# Altium PCB PCB_PRO_OK_08-08-2011.PcbDoc (part 2 of 2)
Units mil, origin at the board's own origin, x right, y up, seen from the top; angles counter-clockwise.
Board outline 6942 x 4824 mil, 2 copper layers (Top Layer, Bottom Layer); 164 components, 92 nets, 659 pads, 68 vias.
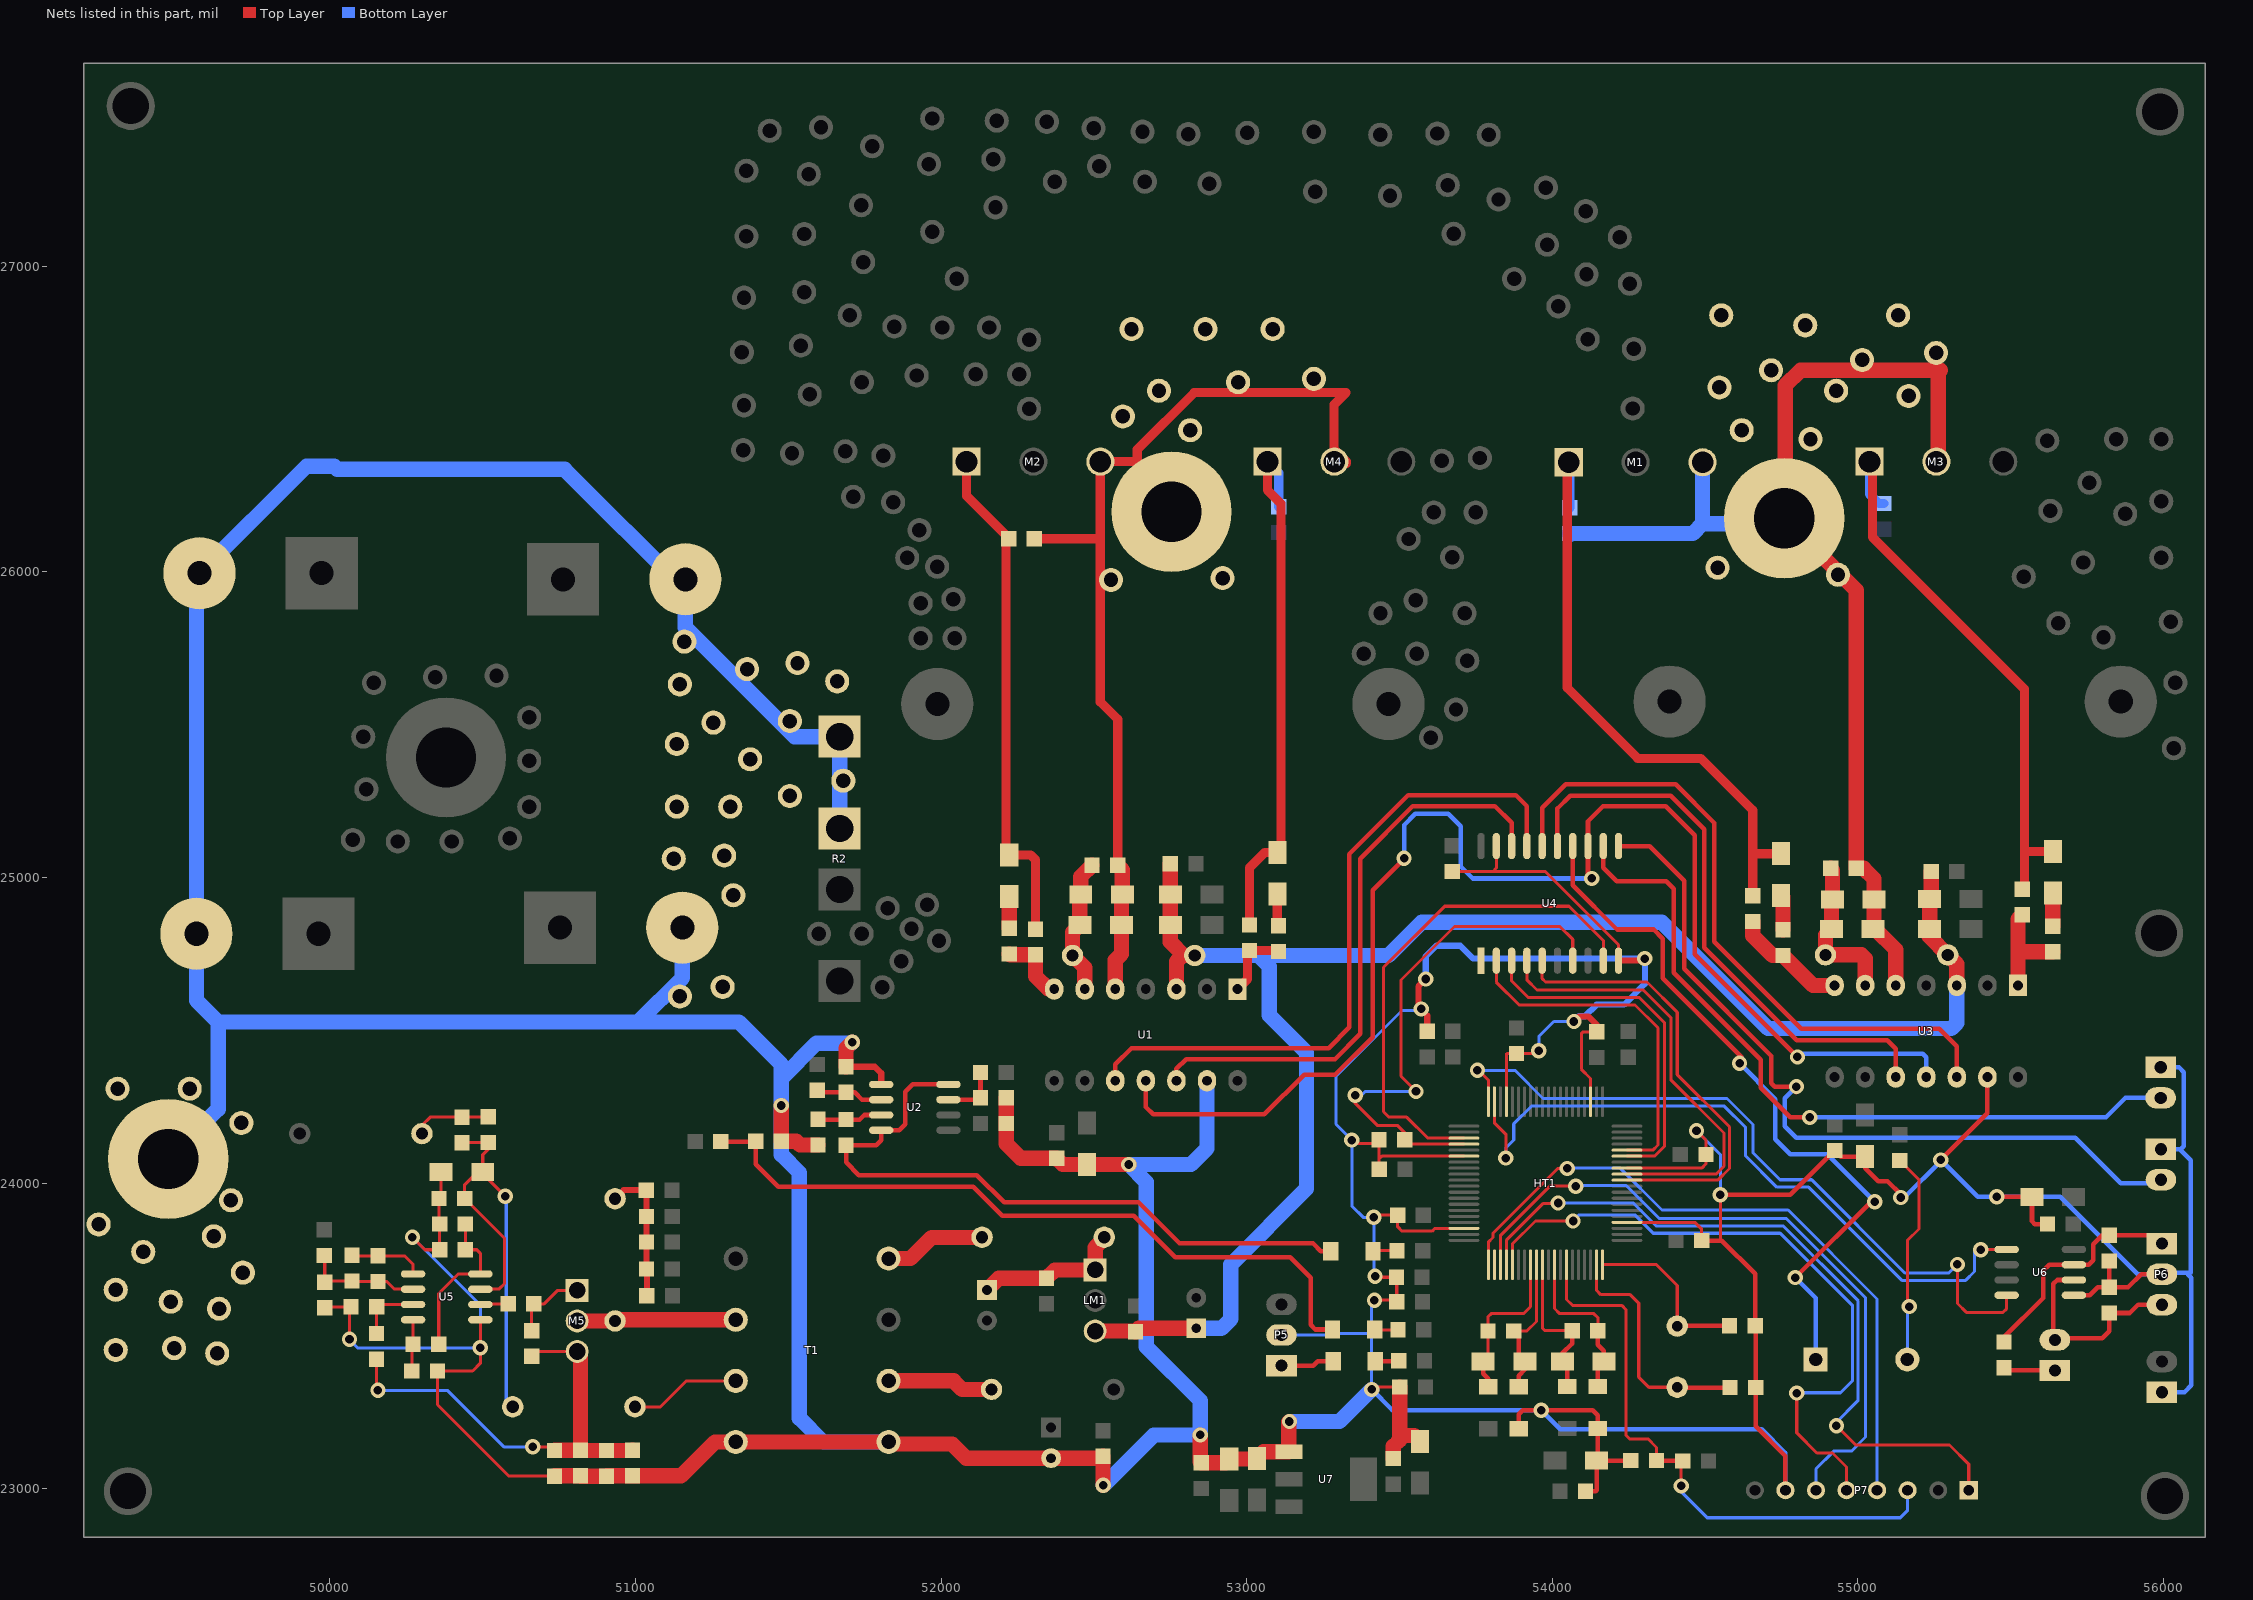
[diagram p2: the nets of this part, all layers, seen from the top]

## Via types
v1: diameter 50, hole 28, Top Layer to Bottom Layer, 68 vias

## Nets (pads, with @x,y where several pads share a name; then routed paths per layer and width w, separated by ;. In a path a pad name is that pad's centre, name@x,y a point inside that pad or via, vN(x,y) a via of type N, cw(c..) or ccw(c..) an arc to the next point about the centre after c; other vN are vias at no path point) (continued)
GND: C01.1 C1.2 C2.2 C3.1 C03.2 C7.2 C8.2 C14.1 C15.1 C16.1 C17.2 C18.2 C21.1 C23.2 C24.2 C25.2 C26.2 C27.1 C28.1 C29.1 C30.1 C32.1 C33.1 C34.1 C35.1 C36.1 C37.1 C38.2 C39.2 C40.2 C41.1 C42.1 C43.1 C44.2 C53.2 C54.1 C55.1 C56.1 C57.1 C58.2 C59.2 C60.2 C61.1 HT1.24 HT1.33 HT1.43 HT1.57 HT1.66 HT1.78 J4.1 L6.2 L7.2 P2.1 P3.1 P4.1 P5.2 P6.2 P7.7 pad.115 pad.116 pad.117 pad.118 pad.119 pad.120 pad.121 pad.122 pad.123 pad.124 pad.125 pad.126 pad.127 pad.128 pad.163 pad.164 pad.165 pad.166 pad.167 pad.168 pad.169 pad.170 pad.171 pad.172 pad.173 pad.174 pad.175 pad.176 pad.177 pad.178 pad.182 pad.183 R2.1 R2.2 R8.2 R14.2 R27.1 R36.2 R37.2 R38.2 R39.2 R40.1 R41.1 T1.4 T1.5 U1.13 U2.4 U3.13 U4.10 U4.19 U5.5 U6.5 U7.1 | length 31789.2
  Top Layer w10: R40.1@49983,23592 49986,23595 C30.1@50069,23595 50064,23590 v1(50064,23489) ; v1(50270,23823) 50311,23782 C24.2@50359,23782 C25.2@50359,23866 50357,23868 C03.2@50357,23950 50364,23957 C23.2@50364,24036 ; U5.5@50492.14,23552.81 v1(50492.14,23461) 50492.14,23410.14 50467,23385 C26.2@50352,23385 50352,23275 50586,23041 R39.2@50735,23041 R39.2@50737,23039 ; R38.2@50817,23039 R38.2@50820,23042 ; R37.2@50904,23042 R37.2@50905,23041 R37.2@50906,23042 ; v1(53344,24141) 53344,24129 53433,24129 53433,24079 ; v1(53409,23325) 53413,23321 53425,23333 C37.1@53501,23333 ; v1(53416,23888) 53423,23895 C36.1@53494,23895 53494,23857 53508,23843 53607,23843 53616.09,23852.09 HT1.78@53711.06,23852.09 ; v1(53418,23617) 53486,23617 C27.1@53491,23612 53491,23691 C32.1@53490,23692 53423,23692 v1(53420,23695) ; C43.1@53434,24045 53433,24046 53433,24079 ; v1@53569,24572 v1(53571,24570) ; C21.1@53673,25020 53806,25020 ; HT1.66@53711.06,24088.31 53442.31,24088.31 53433,24079 ; U4.19@53817,25103 53817,25031 53806,25020 ; HT1.57@53849.84,24266.46 53849.84,24421.84 53852,24424 C35.1@53883,24424 53947,24424 v1(53956,24433) ; HT1.43@54125.43,24266.46 54125.43,24342.57 54095,24373 54095,24489 54101,24495 C34.1@54146,24495 ; U4.10@54217,24728 54217,24780 53977,25020 53806,25020 ; HT1.24@54244.52,23871.78 54466.22,23871.78 54489,23849 C33.1@54489,23812 ; HT1.33@54244.52,24048.94 54488.94,24048.94 54503,24063 C42.1@54503,24094 54503,24140 v1(54472,24171) ; v1(54550,23962) 54550,23817 54555,23812
  Top Layer w15: C59.2@52943,23097 C59.2@52945,23099 ; L7.2@53890,23196 53890,23244 53903,23257 v1(53964,23257) 54133,23257 54149,23241 L6.2@54149,23197 54149,23096 C53.2@54145,23092 ; C54.1@54109,22992 54142,22992 54145,22995 C53.2@54145,23092 ; C56.1@54257,23092 C53.2@54145,23092 ; C33.1@54489,23812 54555,23812 54664,23703 C29.1@54664,23533 54666,23531 C28.1@54666,23331 54666,23204 54763,23107 P7.7@54763,22995 ; v1(54550,23962) 54779,23962 C16.1@54924,24107 54944,24087 C18.2@55024,24087 ; C18.2@55024,24073 C18.2@55024,24087 ; v1(55140,23953) 55140,23963 55097,24006 55067,24006 55024,24049 C18.2@55024,24087 ; v1(55271,24076) 55424,24229 U3.13@55424,24347 ; v1(55455,23955) C40.2@55570,23955 55570,23875 55579,23866 C41.1@55621,23866 ; U6.5@55707,23633 55759,23633 55785,23659 C44.2@55823,23659 ; C55.1@55823,23745 C44.2@55823,23659 ; P6.2@55995,23702 55927,23702 55884,23659 C44.2@55823,23659
  Top Layer w20: C14.1@51689,24381 51783,24381 51804,24360 U2.4@51804,24323 ; v1@53562,24577 53562,24644 v1(53586,24668) ; C01.1@53591,24497 53591,24548 ; v1@54087,24545 54119,24545 54146,24518 C34.1@54146,24495 ; U4.10@54217,24728 v1@54296,24728
  Top Layer w50: R39.2@50735,23041 50736,23042 R38.2@50820,23042 50821,23041 R37.2@50905,23041 ; R37.2@50906,23042 R36.2@50990,23042 51149,23042 51260,23153 T1.4@51328,23153 T1.5@51828,23153 51835,23146 52036,23146 52082,23100 C39.2@52360,23100 52524,23100 C38.2@52530,23106 52530,23011 v1(52531,23011) ; v1(51477,24254) R41.1@51477,24137 51526,24137 51538,24125 R8.2@51597,24125 ; C14.1@51689,24381 51689,24441 v1(51709,24461) ; R14.2@52213,24279 C3.1@52213,24195 52213,24129 52261,24081 C15.1@52378,24081 52398,24061 C17.2@52478,24061 v1(52614,24061) ; v1(52848,23176) 52848,23088 C57.1@52851,23085 52931,23085 C59.2@52943,23097 53031,23097 C58.2@53033,23099 53055,23121 U7.1@53138,23121 53138,23218 v1(53140,23220) ; C61.1@53480,23099 53480,23139 ; 53496,23155 53501,23160 53501,23174 ; C37.1@53501,23333 53501,23174 ; C60.2@53548,23174 53501,23174
  Bottom Layer w10: v1(50064,23489) 50062,23489 50090,23461 v1(50492.14,23461) 50492.14,23600.86 v1(50270,23823) ; P5.2@53114,23503 53283,23503 53288,23508 53409,23508 ; v1(53409,23325) 53409,23508 ; v1(53418,23617) 53409,23608 53409,23508 ; v1(53420,23695) 53416,23699 v1(53416,23888) 53381,23888 53344,23925 v1(53344,24141) 53292,24193 53292,24349 53508,24565 53571,24565 v1(53571,24570) ; v1(53956,24433) 53956,24480 54005,24529 v1(54071,24529) ; v1(54472,24171) 54551,24092 54551,23963 v1(54550,23962)
  Bottom Layer w15: v1(53409,23325) 53477,23257 v1(53964,23257) 54026,23195 54685,23195 54763,23117 P7.7@54763,22995 ; v1(55140,23953) 55152,23953 55271,24072 v1(55271,24076) 55392,23955 v1(55455,23955) 55663,23955 55916,23702 P6.2@55995,23702 56000,23707 56089,23707 56089,24075 56053,24111 ; P2.1@55991,24379 56051,24379 56067,24363 56067,24121 56057,24111 56053,24111 ; P3.1@55992,24111 56053,24111 ; P4.1@55995,23316 56069,23316 56091,23338 56091,23690 56079,23702 56084,23702
  Bottom Layer w20: v1(53586,24668) 53586,24742 53621,24777 53699,24777 53741,24735 v1(54303,24735) 54303,24652 54235,24584 54145,24584 54107,24546 v1@54088,24546
  Bottom Layer w50: J4.1@49471,24079 49634,24242 49634,24527 ; C8.2@51153,24836 51153,24672 51008,24527 ; C2.2@51163,25976 C2.2@51163,25941 ; R2.2@51668,25161 R2.1@51668,25461 51520,25461 51163,25818 C2.2@51163,25941 ; v1(51709,24461) 51706,24458 51592,24458 51477,24343 ; T1.5@51828,23153 51614,23153 51536,23231 51536,24034 51477,24093 v1(51477,24254) 51477,24343 ; v1(52531,23011) 52696,23176 v1(52848,23176) 52848,23288 52671,23465 52671,24004 v1(52614,24061) 52818,24061 52870,24113 U1.13@52870,24335 ; v1(53140,23220) 53304,23220 v1(53409,23325) ; C7.2@49569.5,25992.5 49563,25986 C1.2@49563,24816 49563,24598 49634,24527 ; C7.2@49569.5,25992.5 C7.2@49573,25996 ; C7.2@49569.5,25992.5 49566,25996 C7.2@49573,25996 ; C7.2@49573,25996 49923,26346 50014,26346 50024,26336 50768,26336 C2.2@51163,25941 ; 49634,24527 51008,24527 ; 51008,24527 51338,24527 51477,24388 51477,24343
I_IN_SEN: L2.1 R7.2 U2.1 U2.5 | length 2261.6
  Top Layer w15: U2.5@52024,24323 51907,24323 51883,24299 51883,24193 51863,24173 U2.1@51804,24173 51804,24140 51788,24124 R7.2@51689,24124 51689,24068 51731,24026 52117,24026 52206,23937 52646,23937 52780,23803 53217,23803 53243,23777 L2.1@53275.21,23777
LED_ATTERY_LOW: P2.2 U4.12 | length 2475.6
  Top Layer w15: U4.12@54167,25103 54167,25032 54211,24988 54373,24988 54398,24963 54398,24688 54682,24404 54682,24312.5 54741.5,24253 54741,24253 54779,24215 v1(54843,24215)
  Bottom Layer w15: v1(54843,24215) 55812,24215 55876,24279 P2.2@55991,24279
LED_VERLOAD: P3.2 U4.11 | length 2600.5
  Top Layer w15: U4.11@54217,25103 54319,25103 54432,24990 54432,24701 54717,24416 54717,24327 54728,24316 54781,24316 v1@54790,24307 ; v1@54799,24298 v1(54799,24316)
  Bottom Layer w15: v1(54799,24316) 54761,24278 54761,24186 54798,24149 55711,24149 55860,24000 55981,24000 P3.2@55992,24011
M+: C13.1 C_BOOT2.2 C_BOOT02.2 J3.1 M2.3 M4.2 pad.105 pad.106 pad.107 pad.108 pad.109 pad.110 pad.111 pad.112 pad.113 pad.114 R6.2 U1.5 | length 3167.4
  Top Layer w30: R6.2@52305,26109 52519,26109 52521,26111 ; C13.1@52578,25040 52578,25518 52521,25575 52521,26111 ; M4.2@53327,26356 53327,26361 53286,26402 53286,26548 53325,26587 52828,26587 52642,26401 52642,26361 M2.3@52521,26361 52521,26111
  Top Layer w50: U1.5@52570,24635 52570,24730 52590,24750 C_BOOT2.2@52590,24845 52590,24942 C_BOOT02.2@52593,24945 52593,25025 C13.1@52578,25040
M-: C12.1 C_BOOT1.2 C_BOOT01.2 J2.1 M1.3 M3.2 pad.92 pad.93 pad.94 pad.95 pad.96 pad.97 pad.98 pad.99 pad.100 pad.101 pad.102 pad.103 pad.104 R5.2 U3.5 | length 3883.4
  Top Layer w50: J2.1@54759,26176 54995,25940 C12.1@54995,25030 55019,25030 55053,24996 C_BOOT01.2@55053,24928 55053,24835 C_BOOT1.2@55050,24832 55056,24832 55124,24764 U3.5@55124,24647 ; J2.1@54790,26207 54762,26235 54762,26610 54812,26660 55270,26660 55263,26653 M3.2@55263,26351
  Bottom Layer w50: R5.2@54060,26123 R5.2@54057,26126 54460,26126 54492,26158 ; M1.3@54492,26359 54492,26158 ; J2.1@54759,26176 54741,26158 54492,26158
NET_G1: DG2.1 M1.1 R3.1 R5.1 | length 2027.2
  Top Layer w30: M1.1@54049,26351 54049,25621 54280,25390 54486,25390 54656,25220 54656,25076 ; R3.1@54656,24940 54656,25076 ; DG2.1@54749,25078 54658,25078 54656,25076
  Bottom Layer w30: M1.1@54054,26359 54057,26356 R5.1@54057,26210
NET_G2: R3.2 R04.2 U3.7 | length 381.5
  Top Layer w50: R3.2@54656,24856 54656,24810 54721,24745 R04.2@54755,24745 54853,24647 U3.7@54924,24647
NET_G3: R09.2 R9.2 U3.1 | length 351.6
  Top Layer w50: U3.1@55524,24647 55524,24755 ; R9.2@55538,24878 55524,24864 55524,24755 ; R09.2@55638,24757 55526,24757 55524,24755
NET_G5: DG4.1 M3.1 R9.1 R11.1 | length 1857
  Top Layer w30: M3.1@55048,26351 55048,26114 55545,25617 55545,25084 ; R9.1@55538,24962 55545,24969 55545,25084 ; DG4.1@55638,25085 55546,25085 55545,25084
  Bottom Layer w30: M3.1@55038,26361 55038,26255 55069,26224 R11.1@55085,26224
NET_G6: DG3.1 M4.1 R10.2 R12.1 | length 1771.3
  Top Layer w30: R10.2@53009,24845 53009,25032 53059,25082 DG3.1@53101,25082 53112,25082 53112,26224 53068,26268 M4.1@53068,26361
  Bottom Layer w30: M4.1@53068,26361 53105,26324 R12.1@53105,26213
NET_G8: DG1.1 M2.1 R4.2 R6.1 | length 1660.2
  Top Layer w30: M2.1@52083,26361 52083,26249 52212.33,26119.67 DG1.1@52212.33,25074 ; DG1.1@52223,25074 52293,25074 52309,25058 R4.2@52309,24831
NET_G9: R05.1 R10.1 U1.1 | length 238.4
  Top Layer w30: U1.1@52970,24635 53003,24668 53003,24755 R10.1@53009,24761 53101,24761 R05.1@53104,24758
NET_G10: R4.1 R06.1 U1.7 | length 235.6
  Top Layer w50: R06.1@52223,24750 52226,24747 R4.1@52309,24747 52309,24677 52351,24635 U1.7@52370,24635
NetC02_2: C02.2 C22.2 D2.1 R20.2 R21.2 R22.2 | length 460.4
  Top Layer w20: D2.1@50933,23949 50961,23977 C02.2@51035,23977 51036,23976 C22.2@51036,23891 R22.2@51036,23807 R20.2@51036,23719 51037,23718 R21.2@51037,23631
NetC12_2: C12.2 C_BOOT01.1 C_BOOT1.1 D_BOOT1.2 U3.6 | length 518
  Top Layer w50: C12.2@54911,25030 54917,25024 C_BOOT01.1@54917,24928 54914,24925 C_BOOT1.1@54914,24832 54894,24812 D_BOOT1.2@54894,24747 55012,24747 55024,24735 U3.6@55024,24647
NetC13_2: C13.2 C_BOOT2.1 C_BOOT02.1 D_BOOT2.2 U1.6 | length 448.1
  Top Layer w50: U1.6@52470,24635 52470,24705 D_BOOT2.2@52430,24745 52430,24821 C_BOOT2.1@52454,24845 52454,24942 C_BOOT02.1@52457,24945 52457,25003 C13.2@52494,25040
NetC14_2: C14.2 R1.1 U2.3 | length 221.8
  Top Layer w15: R1.1@51595,24304 51602,24297 C14.2@51689,24297 51717,24297 51741,24273 U2.3@51804,24273
NetC24_1: C24.1 C25.1 R28.2 U5.8 | length 534
  Top Layer w10: R28.2@50356,23473 50356,23639 50419.81,23702.81 U5.8@50492.14,23702.81 50492.14,23770.14 50480.28,23782 C24.1@50443,23782 C25.1@50443,23866
NetC26_1: C26.1 R28.1 U5.4 | length 169.5
  Top Layer w10: C26.1@50268,23385 50268,23469 R28.1@50272,23473 50272,23552.67 U5.4@50272.14,23552.81
NetC28_2: C28.2 HT1.19 X1.1 | length 794.4
  Top Layer w10: HT1.19@54145.11,23733 54145.11,23648.89 54159,23635 54255,23635 54283,23607 54283,23365 54316,23332 X1.1@54409,23332
  Top Layer w15: X1.1@54409,23332 54410,23331 C28.2@54582,23331
NetC29_2: C29.2 HT1.20 X1.2 | length 576.8
  Top Layer w10: HT1.20@54164.8,23733 54341,23733 54409,23665 X1.2@54409,23532
  Top Layer w15: X1.2@54409,23532 54410,23533 C29.2@54580,23533
NetC30_2: C30.2 R33.1 U5.3 | length 209.8
  Top Layer w10: R33.1@50152,23508 50153,23509 C30.2@50153,23595 50160.81,23602.81 U5.3@50272.14,23602.81
NetC31_1: C31.1 R31.2 U5.1 | length 243.7
  Top Layer w10: R31.2@50072,23764 50074,23762 C31.1@50157,23762 50244,23762 50272.14,23733.86 U5.1@50272.14,23702.81
NetC31_2: C31.2 R31.1 R34.1 R40.2 U5.2 | length 389.9
  Top Layer w10: R34.1@49981,23763 49983,23761 R40.2@49983,23676 49987,23680 R31.1@50072,23680 50074,23678 C31.2@50157,23678 50186,23678 50211.19,23652.81 U5.2@50272.14,23652.81
NetC44_1: C44.1 P6.3 PC1.2 U6.6 | length 693.8
  Top Layer w15: PC1.2@55645,23487 PC1.2@55640,23492 ; U6.6@55707,23683 55652,23683 55640,23671 PC1.2@55640,23492 ; P6.3@55995,23602 55917,23602 55890,23575 C44.1@55823,23575 55823,23515 55800,23492 PC1.2@55640,23492
NetC47_1: C47.1 C48.1 D3.1 LM1.1 | length 507.2
  Top Layer w50: C47.1@52150,23650 52189,23689 C48.1@52345,23689 52372,23716 LM1.1@52504,23716 52504,23789 52540,23825 D3.1@52540,23827
NetC49_1: C49.1 C50.2 HT1.8 L4.1 | length 532
  Top Layer w10: C49.1@53774,23416 53790,23432 C50.2@53790,23516 53790,23563 53800,23573 53906,23573 53928.58,23595.58 HT1.8@53928.58,23733
  Top Layer w15: C49.1@53774,23416 53774,23376 53790,23360 L4.1@53790,23333.79
NetC49_2: C49.2 C50.1 HT1.9 L7.1 | length 478.3
  Top Layer w10: C50.1@53874,23516 53917,23516 53948.26,23547.26 HT1.9@53948.26,23733
  Top Layer w15: C50.1@53874,23516 53890,23500 53890,23436 C49.2@53910,23416 53910,23390 53890,23370 L7.1@53890,23333.79
NetC51_1: C51.1 C52.2 HT1.10 L5.1 | length 510.4
  Top Layer w10: HT1.10@53967.95,23733 53967.95,23525.05 53976,23517 C52.2@54065,23517
  Top Layer w15: L5.1@54049,23334.79 54049,23401 C51.1@54033,23417 54033,23443 54065,23475 C52.2@54065,23517
NetC51_2: C51.2 C52.1 HT1.12 L6.1 | length 539.1
  Top Layer w10: HT1.12@54007.32,23733 54007.32,23589.68 54024,23573 54136,23573 54149,23560 C52.1@54149,23517
  Top Layer w15: L6.1@54149,23334.79 54149,23397 C51.2@54169,23417 54169,23451 54149,23471 C52.1@54149,23517
NetC55_2: C55.2 P6.1 R43.1 U6.7 | length 764.7
  Top Layer w15: R43.1@55478,23480 55478,23495 55607,23624 55607,23714 55626,23733 U6.7@55707,23733 55756,23733 55771,23748 55771,23800 55800,23829 C55.2@55823,23829 55968,23829 P6.1@55995,23802
NetD1_2: D1.2 R16.1 R17.1 | length 255.6
  Top Layer w10: D1.2@50301,24162 50301,24189 50328,24216 R16.1@50432,24216 50433,24217 R17.1@50518,24217
NetD2_2: D2.2 M5.2 T1.2 | length 520.7
  Top Layer w10: D2.2@50933,23549 D2.2@50937,23553
  Top Layer w50: M5.2@50809,23549 D2.2@50933,23549 ; D2.2@50937,23553 T1.2@51328,23553
NetD3_2: D3.2 T1.8 | length 340.6
  Top Layer w50: T1.8@51828,23753 51900,23753 51969,23822 D3.2@52140,23822
NetD4_2: D4.2 T1.6 | length 348.6
  Top Layer w50: T1.6@51828,23353 52041,23353 52069,23325 D4.2@52165,23325
NetD5_2: D5.2 T1.3 | length 365.2
  Top Layer w10: D5.2@50998,23268 51082,23268 51167,23353 T1.3@51328,23353
NetDG1_2: DG1.2 R06.2 | length 104
  Top Layer w50: R06.2@52223,24834 DG1.2@52223,24938
NetDG2_2: DG2.2 R04.1 | length 115.5
  Top Layer w50: DG2.2@54749,24942 54755,24936 R04.1@54755,24829
NetDG3_2: DG3.2 R05.2 | length 105.7
  Top Layer w30: DG3.2@53100,24946 53100,24846 R05.2@53104,24842
NetDG4_2: DG4.2 R09.1 | length 108
  Top Layer w50: R09.1@55638,24841 DG4.2@55638,24949
NetL1_2: L1.2 R30.2 | length 76.6
  Top Layer w10: L1.2@53418.79,23521 53419.79,23520 R30.2@53495,23520
NetL2_2: L2.2 R35.2 | length 79.8
  Top Layer w10: L2.2@53413,23777 53415,23779 R35.2@53492,23779
NetL3_1: L3.1 P5.1 | length 175
  Top Layer w15: P5.1@53114,23403 53218,23403 53232,23417 L3.1@53283.21,23417
NetL3_2: L3.2 R42.2 | length 77.8
  Top Layer w15: L3.2@53421,23417 53496,23417 R42.2@53498,23419
NetLS1_1: LS1.1 U4.14 | length 2428.2
  Top Layer w15: U4.14@54067,25103 54067,24975 54212,24830 54332,24830 54362,24800 54362,24670 54620,24412 54613,24405 v1(54613,24392) ; v1(54795,23691) 55055,23951 v1(55055,23939) ; LS1.1@54839,23446 LS1.1@54862,23423
  Bottom Layer w15: v1(54613,24392) 54730,24275 54730,24143 54779,24094 54900,24094 v1(55055,23939) ; v1(54795,23691) 54862,23624 LS1.1@54862,23423
NetLS1_2: LS1.2 R15.1 | length 697.8
  Top Layer w10: R15.1@55137,24074 55200,24011 55200,23850 55162,23812 55162,23602 v1(55168,23596)
  Bottom Layer w10: LS1.2@55162,23423 55162,23590 v1(55168,23596)
NetM5_1: M5.1 R26.1 R29.1 | length 251.1
  Top Layer w10: R29.1@50660,23517 50660,23598 R26.1@50667,23605 50701,23605 50745,23649 M5.1@50809,23649
NetM5_3: M5.3 R29.2 R33.2 R36.1 R37.1 R38.1 R39.1 | length 1537
  Top Layer w10: R33.2@50152,23424 50152,23327 v1(50157,23322) ; R29.2@50660,23433 50676,23449 M5.3@50809,23449 M5.3@50803,23443 ; v1(50664,23137) 50723,23137 R39.1@50735,23125 R39.1@50736,23126 ; R38.1@50803,23143 R38.1@50820,23126 R38.1@50821,23125 ; R37.1@50905,23125 R37.1@50906,23126
  Top Layer w50: R39.1@50736,23126 R38.1@50820,23126 50820,23438 M5.3@50809,23449 ; R38.1@50821,23125 R37.1@50905,23125 50989,23125 R36.1@50990,23126
  Bottom Layer w10: v1(50157,23322) 50384,23322 50569,23137 v1(50664,23137)
NetPC1_1: PC1.1 R43.2 | length 170.7
  Top Layer w15: R43.2@55478,23396 55487,23387 PC1.1@55645,23387
NetR7_1: R7.1 R8.1 U2.2 | length 213.6
  Top Layer w15: R8.1@51597,24209 51598,24208 R7.1@51689,24208 51733,24208 51748,24223 U2.2@51804,24223
NetR13_2: R13.2 R14.1 U2.6 | length 190.5
  Top Layer w15: U2.6@52024,24273 52123,24273 R14.1@52129,24279 R13.2@52129,24362
NetR26_2: R26.2 U5.6 | length 91.8
  Top Layer w10: U5.6@50492.14,23602.81 50494.33,23605 R26.2@50583,23605
NRESET: C56.2 HT1.14 P7.3 R44.1 | length 1933.2
  Top Layer w10: HT1.14@54046.69,23733 54046.69,23619.31 54066,23600 54227,23600 54242,23585 54242,23174 54253,23163 54313,23163 54341,23135 C56.2@54341,23092 ; v1(54422,23009) 54422,23088 R44.1@54426,23092
  Top Layer w15: C56.2@54341,23092 R44.1@54426,23092
  Bottom Layer w10: v1(54422,23009) 54422,22990 54507,22905 55139,22905 55163,22929 P7.3@55163,22995
NTRST: HT1.4 P7.1 | length 2427.3
  Top Layer w10: HT1.4@53849.84,23733 53849.84,23812.84 53971,23934 v1@54019,23934 ; v1(54930,23206) 54993,23143 55300,23143 55363,23080 P7.1@55363,22995
  Bottom Layer w10: v1(54019,23935) 54265.06,23935 54340.06,23860 54755.94,23860 55001,23614.94 55001,23289 54924,23212 v1(54930,23206)
OFF_PWM: HT1.64 R27.2 U4.7 | length 1770.5
  Top Layer w10: v1(53355,24288) 53355,24261 53427,24189 53493,24189 53517,24165 R27.2@53517,24142 53517,24129 53518.32,24127.68 HT1.64@53711.06,24127.68 ; v1(53554,24300) 53554,24301 53505,24350 53505,24665 53680,24840 54025,24840 54067,24798 U4.7@54067,24728
  Bottom Layer w10: v1(53355,24288) 53376,24288 53388,24300 v1(53554,24300)
OFF_PWM_O: U1.11 U3.11 U4.13 | length 4435
  Top Layer w15: U1.11@52670,24335 52670,24249 52694,24225 53058,24225 53188,24355 53289,24355 53412,24478 53412,24958 53515,25061 v1(53515,25063) ; v1(54129,24997) 54117,25009 U4.13@54117,25103 54117,25184 54166,25233 54371,25233 54466,25138 54466,24749.35 v1(54802.35,24413)
  Bottom Layer w15: v1(53515,25063) 53515,25172 53552,25209 53660,25209 53701,25168 53701,25036 53740,24997 v1(54129,24997) ; v1(54802.35,24413) 54813.35,24424 55212,24424 55224,24412 U3.11@55224,24347
OVERLOAD: HT1.63 U4.9 | length 1685.4
  Top Layer w10: HT1.63@53711.06,24147.37 53592.23,24147.37 53523.6,24216 53465.82,24216 53448,24233.82 53448,24706.18 53647.82,24906 54055,24906 54167,24794 U4.9@54167,24728
PWM1H: HT1.31 U4.5 | length 1479.7
  Top Layer w10: U4.5@53967,24728 53967,24669 53978,24658 54310,24658 54409,24559 54409,24355 54580,24184 54580,24048.16 54541.41,24009.57 HT1.31@54244.52,24009.57
PWM1H_O: U3.10 U4.15 | length 1911
  Top Layer w15: U4.15@54017,25103 54017,25226 54059,25268 54388.33,25268 54498,25158.33 54498,24769.67 54799.67,24468 55096,24468 55124,24440 U3.10@55124,24347
PWM1L: HT1.32 U4.4 | length 1471.7
  Top Layer w10: U4.4@53917,24728 53917,24665.26 53950.26,24632 54298,24632 54388,24542 54388,24338 54562,24164 54562,24055.62 54535.64,24029.26 HT1.32@54244.52,24029.26
PWM1L_O: U3.12 U4.16 | length 2197.7
  Top Layer w15: U4.16@53967,25103 53967,25228.33 54043.67,25305 54403.65,25305 54530,25178.65 54530,24790 54815,24505 55267,24505 55324,24448 U3.12@55324,24347
PWM2H: HT1.35 U4.3 | length 1163.3
  Top Layer w10: U4.3@53867,24728 53867,24661.52 53920.52,24608 54284,24608 54367,24525 54367,24120.54 54334.77,24088.31 HT1.35@54244.52,24088.31
PWM2H_O: U1.10 U4.17 | length 2243.9
  Top Layer w15: U1.10@52570,24335 52570,24389 52623,24442 53268,24442 53336,24510 53336,25076.91 53529.09,25270 53881,25270 53917,25234 U4.17@53917,25103
PWM2L: HT1.36 U4.2 | length 1152.8
  Top Layer w10: U4.2@53817,24728 53817,24657.78 53891.78,24583 54271,24583 54346,24508 54346,24125 54329,24108 HT1.36@54244.52,24108
PWM2L_O: U1.12 U4.18 | length 1926.7
  Top Layer w15: U1.12@52770,24335 52770,24374 52802,24406 53289,24406 53372,24489 53372,25062 53544,25234 53812,25234 53867,25179 U4.18@53867,25103
RXD1: HT1.59 U6.1 | length 2339.5
  Top Layer w10: HT1.59@53810.47,24266.46 53810.47,24197.53 53848,24160 v1(53848,24082) ; v1(55402,23782) 55400,23782 55399,23783 U6.1@55487,23783
  Bottom Layer w10: v1(53848,24082) 53848,24115 53874,24141 53874,24194 53932,24252 54562.94,24252 54633,24181.94 54633,24089.06 54735.06,23987 54838.94,23987 55143.94,23682 55352.94,23682 55382,23711.06 v1@55382,23780 ; v1@55382,23781 v1@55382,23780 ; v1(55402,23782) 55401,23781 55383,23781 v1@55382,23780
TCK: HT1.5 P7.5 | length 2204.6
  Top Layer w10: HT1.5@53869.52,23733 53869.52,23800.52 53945,23876 v1(54068,23876) ; v1(54800,23313) 54800,23183 54866,23117 54917,23117 54963,23071 P7.5@54963,22995
  Bottom Layer w10: v1(54068,23876) 54088.03,23896.03 54270.09,23896.03 54330.12,23836 54746,23836 54983,23599 54983,23354 54943,23314 54800,23314 v1(54800,23313)
TDI: HT1.2
TDO: HT1.1 P7.4 | length 2257.8
  Top Layer w10: HT1.1@53790.78,23733 53790.78,23806.78 53806,23822 53806,23836 54018,24048 v1(54049,24048)
  Bottom Layer w10: v1(54049,24048) 54050,24049 54222,24049 54359,23912 54772,23912 55063,23621 P7.4@55063,22995
TMS: HT1.3 P7.6 | length 2240.9
  Top Layer w10: HT1.3@53830.15,23733 53830.15,23828.15 53992,23990 v1(54077,23990)
  Bottom Layer w10: v1(54077,23990) 54079,23992 54242,23992 54350,23884 54765.88,23884 55025,23624.88 55025,23169 54979,23123 54921,23123 54863,23065 P7.6@54863,22995
TXD1: HT1.60 U6.4 | length 2396.3
  Top Layer w10: v1(53755,24369) 53774,24369 53766.5,24361.5 53790.78,24337.22 HT1.60@53790.78,24266.46 ; v1(55326,23734) 55326,23606 55355,23577 55475,23577 55487,23589 U6.4@55487,23633
  Bottom Layer w10: v1(53755,24369) 53878,24369 53970,24277 54571.88,24277 54657,24191.88 54657,24099 54745,24011 54848.88,24011 55153.88,23706 55298,23706 v1(55326,23734)
V_DRIVE: C4.2 C5.1 C6.1 C9.2 C10.1 C11.1 C45.1 C46.1 D_BOOT1.1 D_BOOT2.1 LM1.3 U1.3 U3.3 | length 5518.4
  Top Layer w50: LM1.3@52504,23516 52634,23516 C45.1@52636,23514 52647,23525 C46.1@52835,23525 ; C9.2@52750,25045 C10.1@52750,24945 C11.1@52750,24845 52750,24789 52794,24745 D_BOOT2.1@52830,24745 ; U1.3@52770,24635 52770,24725 52790,24745 ; C4.2@55240,25020 55240,24935 C5.1@55235,24930 55235,24833 C6.1@55234,24832 55234,24807 D_BOOT1.1@55294,24747 55324,24717 U3.3@55324,24647
  Bottom Layer w50: D_BOOT2.1@52830,24745 53038,24745 ; C46.1@52835,23525 52917,23525 52948,23556 52948,23734 53196,23982 53196,24427 53074,24549 53074,24709 53038,24745 ; U3.3@55324,24647 55324,24524 55306,24506 54706,24506 54358,24854 53573,24854 53464,24745 53038,24745
V_IN_SEN: L1.1 R32.1 R41.2 | length 2391.7
  Top Layer w15: R32.1@51279,24136 51392,24136 R41.2@51393,24137 51393,24062 51467,23988 52105,23988 52200,23893 52630,23893 52766,23757 53143,23757 53210,23690 53210,23536 53225,23521 L1.1@53281,23521
VCC: U4.1
VDD_KA: C03.1 C23.1 D5.1 R16.2 R17.2 U5.7 | length 1539.7
  Top Layer w10: R16.2@50432,24132 50433,24133 R17.2@50518,24133 50518,24111 50500,24093 C23.1@50500,24036 ; U5.7@50492.14,23652.81 50552.81,23652.81 50571,23671 50571,23820 C03.1@50441,23950 50441,23995 50482,24036 C23.1@50500,24036 ; v1(50574,23957) 50500,24031 C23.1@50500,24036
  Bottom Layer w10: v1(50574,23957) 50577,23954 50577,23289 D5.1@50598,23268
pads on no net: HOLE1.1 HOLE2.1 HOLE3.1 HOLE4.1 HOLE5.1 HT1.11 HT1.13 HT1.15 HT1.16 HT1.22 HT1.23 HT1.25 HT1.26 HT1.27 HT1.28 HT1.29 HT1.30 HT1.37 HT1.38 HT1.39 HT1.40 HT1.44 HT1.46 HT1.47 HT1.48 HT1.49 HT1.50 HT1.51 HT1.52 HT1.53 HT1.55 HT1.65 HT1.68 HT1.69 HT1.70 HT1.71 HT1.72 HT1.73 HT1.74 HT1.75 HT1.76 P7.2 U1.4 U1.8 U1.14 U3.4 U3.8 U3.14

## Polygon pours and split planes (outlines as drawn)
GND on Bottom Layer "BOT_GND_BAT" (solid, pour order 1015): 49203,27214 49757,27214 49757,27660 50999,27661 51167,27659 51167,26121 51308,26121 51308,25831 51767,25830 51755,25100 51531,25109 51450,25028 51450,24523 51301,24374 50158,24374 50158,23913 49691,23446 49201,23445
48VDC on Bottom Layer "48V_VDC" (solid, pour order 1001): 49977,25729 49981,25725 50768,25725 50768,25050 50757,25039 50751,25045 49981,25045
M- on Bottom Layer "AC_OUT_TOP3" (solid, pour order 1012): 54439,26964.08 54442.44,26969 55332.14,26969 55333,26322.12 55288.34,26280.48 55066.78,26281.36 55035,26315.92 55037.58,26498.46 54979.18,26498.46 54974.88,25934 54442.44,25935.77
M+ on Bottom Layer "AC_OUT_TOP10" (solid, pour order 1010): 52464,26946.05 52467.45,26951 53361.14,26951 53362,26299.75 53317.14,26257.82 53094.58,26258.71 53062.67,26293.51 53065.25,26477.28 53006.6,26477.28 53002.28,25909 52467.45,25910.78
48VDC on Bottom Layer "48V_M+" (solid, pour order 1006): 51239,27649 51239,26296 51247,26205 51548,26199 51548,25858 51760,25850 51760,25347 51901,25206 52160,25206 52180,25227 52183,25253 52183,25287 52184,25495 52311,25497 52307,26000 52433,25999 52437,26160 52437,26958 52418,26977 52465,27024 53377,27024 53429,26972 53429,26578 53471,26536 53531,26478 54172,26483 54172,26043 54346,26040 54345,26748 54345,27664
COM_S on Bottom Layer "COM_S" (solid, pour order 1009): 51845,25421 52378,25421 52378,25906 53020,25916 53015.56,26522.44 56085,26530 56089,25518 56085,25106 55781,25104 55783,24887 53393,24884 53097,24588 51557,24588 51557,25041 51631,25115 51840,25115
GND on Bottom Layer "GND_BOT_VSL" (solid, pour order 1002): 51477,22842 51483.05,22833 56125.85,22833 56146,22863 56146,24607 56137.27,24620 56038,24446 51752,24433 51752,24508 51271,24508 51272,24203 51470,24204
COM_S on Top Layer "COM_S_TOP" (solid, pour order 1008): 56119,27014 55423,27016 55416,25883 55626,25670 55638,25624 55639,25259 56118,25259
GND on Top Layer "GND_TOP_POWER" (solid, pour order 1000): 49196,24382 49780,24382 49787,24375 49781,24369 49781,23793 49781,23350 49779,23348 49777,23346 49196,23346
M- on Top Layer "AC_OUT_TOP2" (solid, pour order 1011): 54437,26972.05 54440.42,26977 55325.15,26977 55326,26325.12 55281.59,26283.15 55061.26,26284.05 55029.67,26318.87 55032.23,26502.83 54974.16,26502.83 54969.89,25934 54440.42,25935.79
M+ on Top Layer "AC_OUT_TOP1" (solid, pour order 1013): 52463,26946.03 52466.48,26951 53368.13,26951 53369,26297.25 53323.74,26255.16 53099.2,26256.05 53067,26290.98 53069.61,26475.46 53010.43,26475.46 53006.08,25905 52466.48,25906.79
COM_S on Top Layer "COM_S_TOP1" (solid, pour order 1007): 53450,26562 54004,26562 54007,26559 54276,26290 54276,25277 53648,25277 53409,25038 53146,25038 53045,25139 53045,25157 53045,26529 53007,26567
GND on Top Layer "GND_SHUN" (solid, pour order 1004): 50963.51,26200 51781.16,26200 51807.21,26182.74 51810,26180.89 51810,25177.86 51681.63,25092.78 51671.4,25086 51518.85,25083 51470.47,25014 51473.26,24418 51357.92,24373 50960.72,24373 50957,25086
COM_S on Top Layer "COMS_SHUN" (solid, pour order 1005): 51524,25034 52072,25034 52109,24997 52118,24988 52118,24632 52086,24600 52069,24583 51883,24583 51527,24583
48VDC on Top Layer "BOT_48V_BAT" (solid, pour order 1014): 49207,24462 50923,24464 50928,26212 51474,26207 51835,26002 51838,25230 51872,25170 52155,25167 52188,25236 52188,26065 52396,26093 52398,26588 54113,26590 54124,25268 54902,25271 54905,25933 54370,25931 54370,27669 49751,27665 49751,27207 49202,27207
GND on Top Layer "GND_CONTROL" (solid, pour order 1003): 56136,22845 56133.99,22848 56133.99,24610 55794,24609 55794,24410 54646,24416 54433,24605 53497.81,24610 53375.15,24427 53273.94,24276 51487,24276 51487,22843
COM_S on Bottom Solder "TOP_SOLDER8x" (solid): 51572,24998 51572,24604 51832,24604 51848,24620 51922,24694 52027,24694 52180,24694 52267,24781 52399,24913 53044,24913 53058,24913 53235,25090 53488,25343 53721,25343 53878,25343 53961,25260 54073,25148 54641,25148 55132,25148 55186,25094 55199,25081 55467,25081 55578,25081 55712,25215 55739,25242 56029,25242 56034,25242 56074,25282 56074,25693 56074,26389 55980,26483 55453,26483 55445,26483 55423,26461 55424,26460 55424,26263 55424,26242 55287,26105 55247,26065 55247,25894 55247,25857 54736,25346 54730,25340 54285,25340 54258,25340 54162,25436 53809,25789 53168,25789 52827,25789 52618,25580 52392,25354 52392,25284 52237,25129 52197,25089 51915,25089 51915,25066 51850,25001
GND on Bottom Solder "TOP_SOLDER6x" (solid): 49233,23742 49233,24567 49233,26324 49615,26706 49620,26711 51143,26711 51143,26133 51168,26108 51170,26106 51281,26106 51281,25809 51283,25807 51295,25795 51733,25795 51734,25794 51745,25783 51745,25166 51486,25166 51453,25133 51413,25093 51413,24899 51413,24753 51298,24638 51241,24581 51087,24581 51061,24581 50987,24655 50987,26155 50977,26155 50902,26230 50760,26372 49956,26372 49881,26372 49739,26230 49707,26198 49707,24613 49707,24603 49717,24593 49928,24593 51246,24593 51283,24556 51291,24548 51291,24421 51256,24421 51236,24401 51229,24394 50317,24394 49814,24394 49744,24324 49729,24309 49729,23836 49729,23819 49649,23739
M- on Bottom Solder "AC_OUT_TOP10" (solid, pour order 1010): 54440.4,26961.77 54443.86,26966.72 55337.54,26966.72 55338.4,26315.47 55293.55,26273.54 55193,26273 55195,26497 54914,26498 54912,26246 54968,26245 54966,25926 54443.86,25926.5
M+ on Bottom Solder "AC_OUT_TOP10" (solid, pour order 1010): 52465.4,26944.77 52468.86,26949.72 53362.54,26949.72 53363.4,26298.47 53318.55,26256.54 53218,26256 53220,26480 52939,26481 52937,26229 52993,26228 52991,25909 52468.86,25909.5
48VDC on Bottom Solder "48V_VDC" (solid, pour order 1001): 49977,25732 49981.02,25727.98 50771,25727.98 50771,25049.06 50759.96,25038 50753.94,25044.03 49981.02,25044.03
48VDC on Bottom Solder "TOP_SOLDER7x" (solid): 51855,25355 51858,25352 52118,25352 52167,25401 52167,25925 52084,25960 52084,26078 51940,26222 51939,26492 52220,26494 52219,26214 51941,26216 51877,26171 52163,25911 52167,26004 52377,26002 52378,26033 52378,27025 52409,27056 52411,27054 53432,27054 53488,26998 53488,26644 53562,26570 53993,26570 54058,26505 54192,26505 54192,26263 54199,26256 54338,26256 54336,26258 54336,27308 54071,27573 51784,27573 51580,27369 51580,26010 51662,25928 51830,25928 51853,25905
COM_S on Top Solder "TOP_SOLDER5x" (solid): 51544,24999 51544,24612 51546,24610 51563,24593 51634,24593 51882,24593 51886,24597 51904,24615 51904,24629 51938,24663 51941,24666 52031,24666 52034,24666 52084,24716 52085,24717 52085,24937 52085,24949 52035,24999
GND on Top Solder "TOP_SOLDER4x" (solid): 51015,26120 51020,26115 51020,24515 51085,24450 51090,24450 51268,24450 51271,24453 51388,24570 51388,24627 51388,25098 51432,25142 51443,25153 51598,25153 51709,25153 51731,25175 51741,25185 51741,25731 51741,25779 51507,26013 51399,26121 51287,26121
COM_S on Top Solder "TOP_SOLDER3x" (solid): 53453,26493 53453,25993 53357,25897 53273,25813 53273,25659 53273,25454 53298,25429 53327,25400 53654,25400 53777,25400 53825,25448 53835,25458 53835,26492 53837,26492 53838,26493
GND on Top Solder "TOP_SODER2x" (solid, pour order 1000): 49197,24380 49781,24380 49788,24373 49782,24367 49782,23791 49782,23348 49780,23346 49778,23344 49197,23344
GND on Top Solder "TOP_SOLDER1x" (solid): 49801,24615 50900,24615 50900,25101 50900,26268 50897,26271 50903,26277 51531,26277 51582,26277 51853,26006 51853,25465 51853,25239 51868,25224 51910,25182 52106,25182 52106,26058 52091,26073 51938,26226 51938,26355 51938,26527 51944,26533 51947,26536 52220,26536 52223,26533 52220,26530 52220,26277 52220,26275 52260,26235 52263,26232 52374,26232 52374,27029 52383,27038 52462,27117 52509,27117 53444,27117 53550,27011 53568,26993 53568,26780 53568,26752 53628,26692 53643,26677 54134,26677 54161,26677 54194,26644 54197,26641 54197,26304 54197,25633 54242,25588 54278,25552 54570,25552 54727,25552 54739,25564 54772,25597 54772,25672 54772,25781 54754,25799 54727,25826 54642,25826 54377,25826 54344,25859 54344,26030 54344,27463 54221,27586 54203,27604 51805,27604 50357,27604 49810,27057
M+ on Top Solder "AC_OUT_TOP11" (solid, pour order 1010): 52468.7,26947.72 53347.7,26947.72 53349.7,26307.72 53316.55,26270.54 53216,26270 53218,26494 52937,26495 52935,26243 52934.7,26214.72 52968.7,26214.72 52966.7,25922.72 52466.86,25923.5
M- on Top Solder "AC_OUT_TOP10" (solid, pour order 1010): 54447,26966 55326,26966 55328,26326 55294.85,26288.82 55194.3,26288.28 55196.3,26512.28 54915.3,26513.28 54913.3,26261.28 54913,26233 54947,26233 54945,25941 54445.16,25941.78
COM_S on Top Solder "COM_S_TOP1" (solid, pour order 1008): 56120.5,27014 55424.5,27016 55417.5,25883 55627.5,25670 55639.5,25624 55640.5,25259 56119.5,25259
48VDC on Top Solder "48V_TOP_SOLDER" (solid, pour order 1001): 49974.52,25736.97 49978.54,25732.94 50768.52,25732.94 50768.52,25054.03 50757.48,25042.97 50751.46,25049 49978.54,25049

## Silkscreen, mask and mechanical layers (free items; w line width, h text height)
Top Overlay:
  the board outline again, w10
Bottom Solder:
  rectangle: 50998,24511 51253,24671
  rectangle: 51858,25886 52170,26216